# Altium PCB PCB FINAL V1.PcbDoc
Units mm, origin at the board's own origin, x right, y up, seen from the top; angles counter-clockwise.
Board outline 100 x 100 mm, 2 copper layers (Top Layer, Bottom Layer); 34 components, 34 nets, 134 pads, 53 vias.
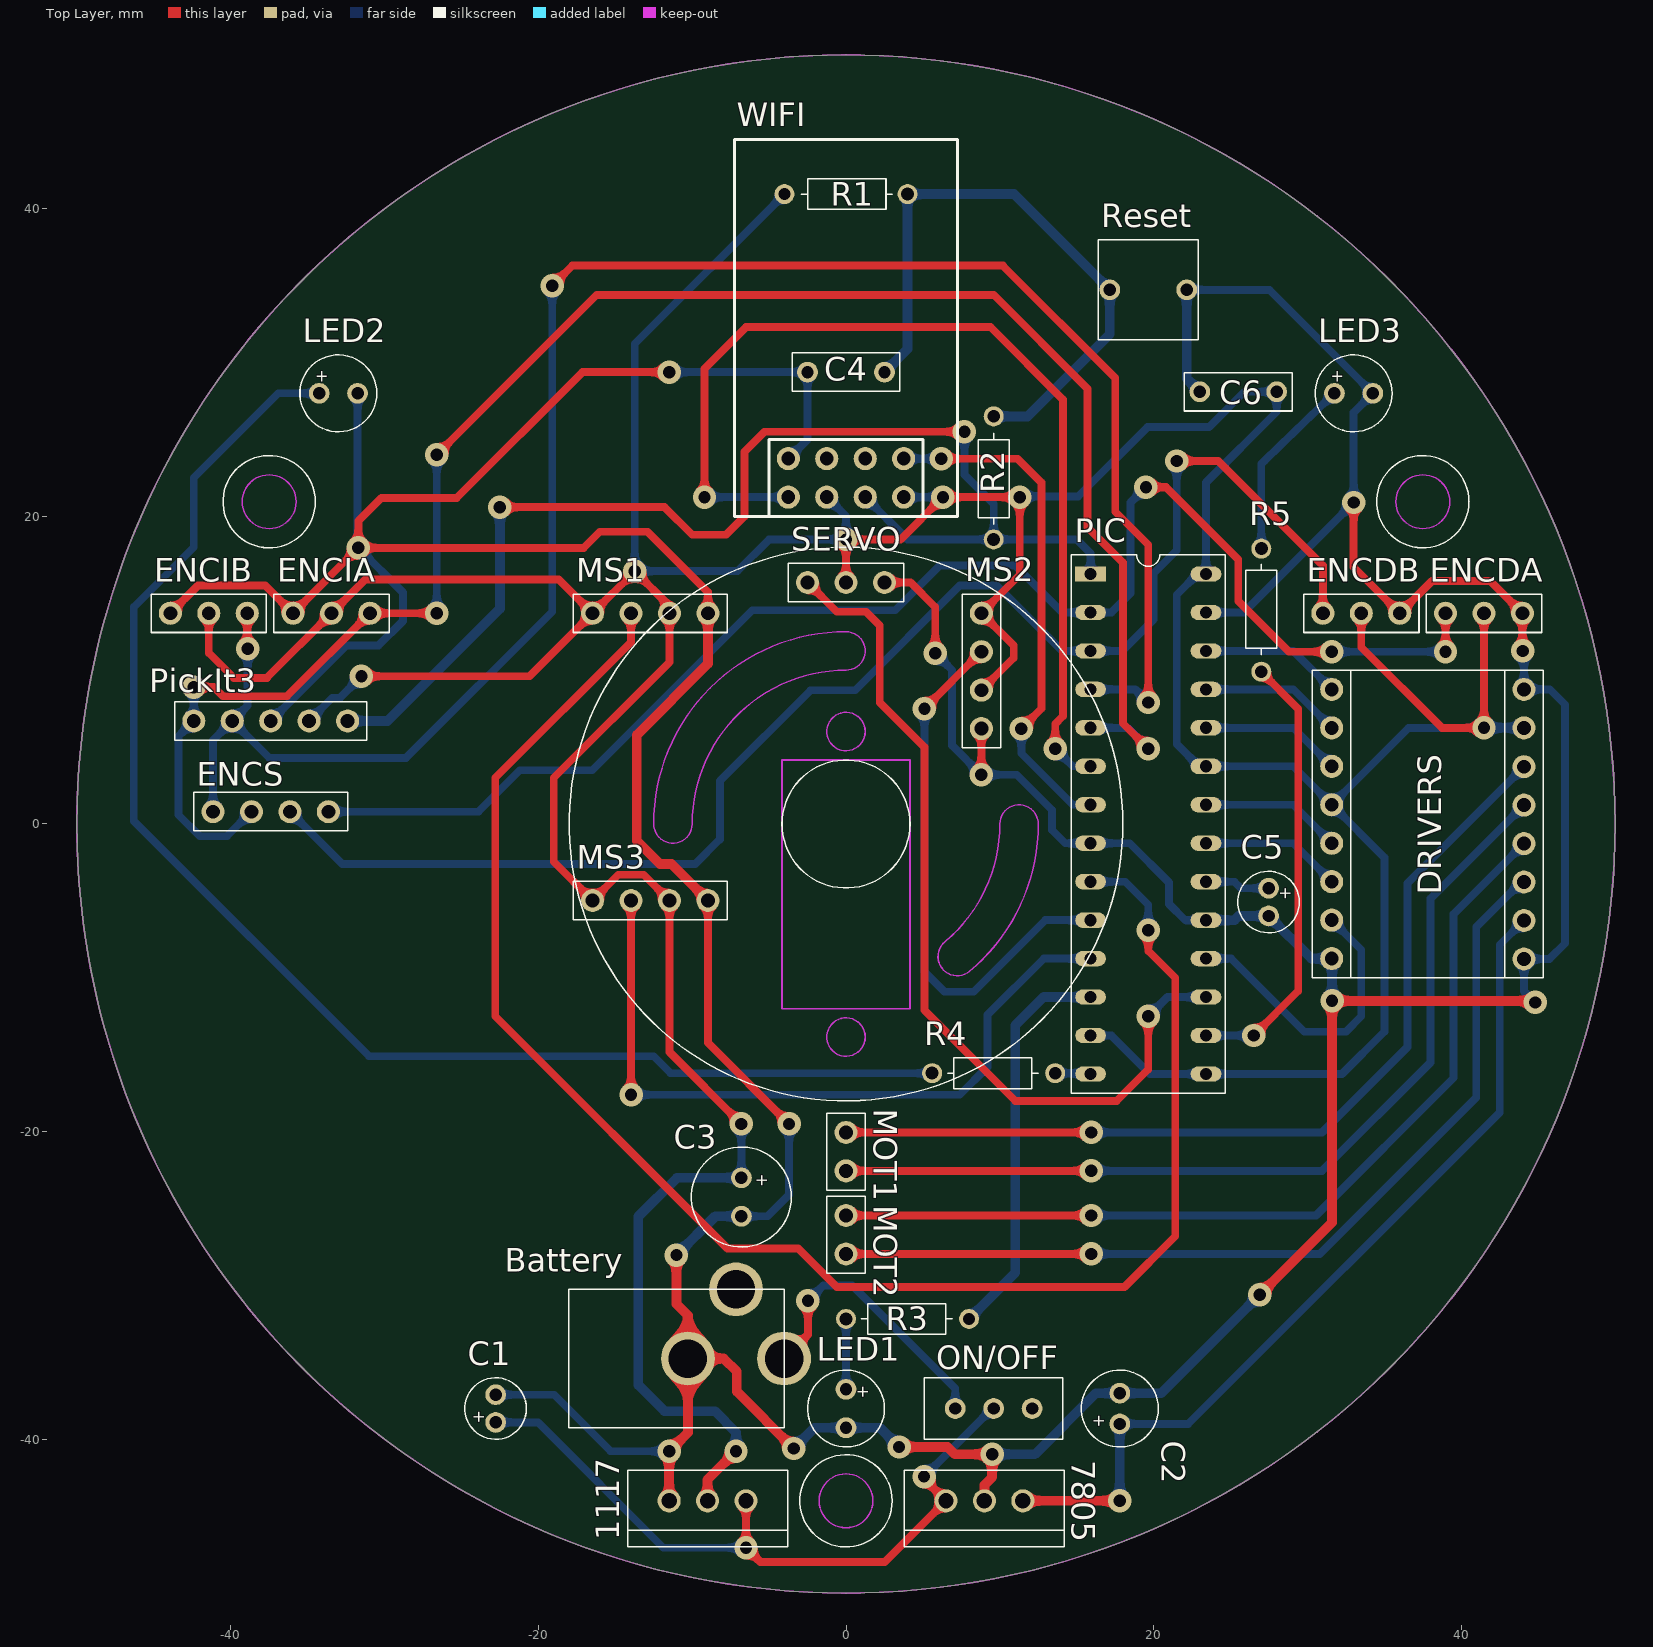
[diagram p0: Top Layer view]
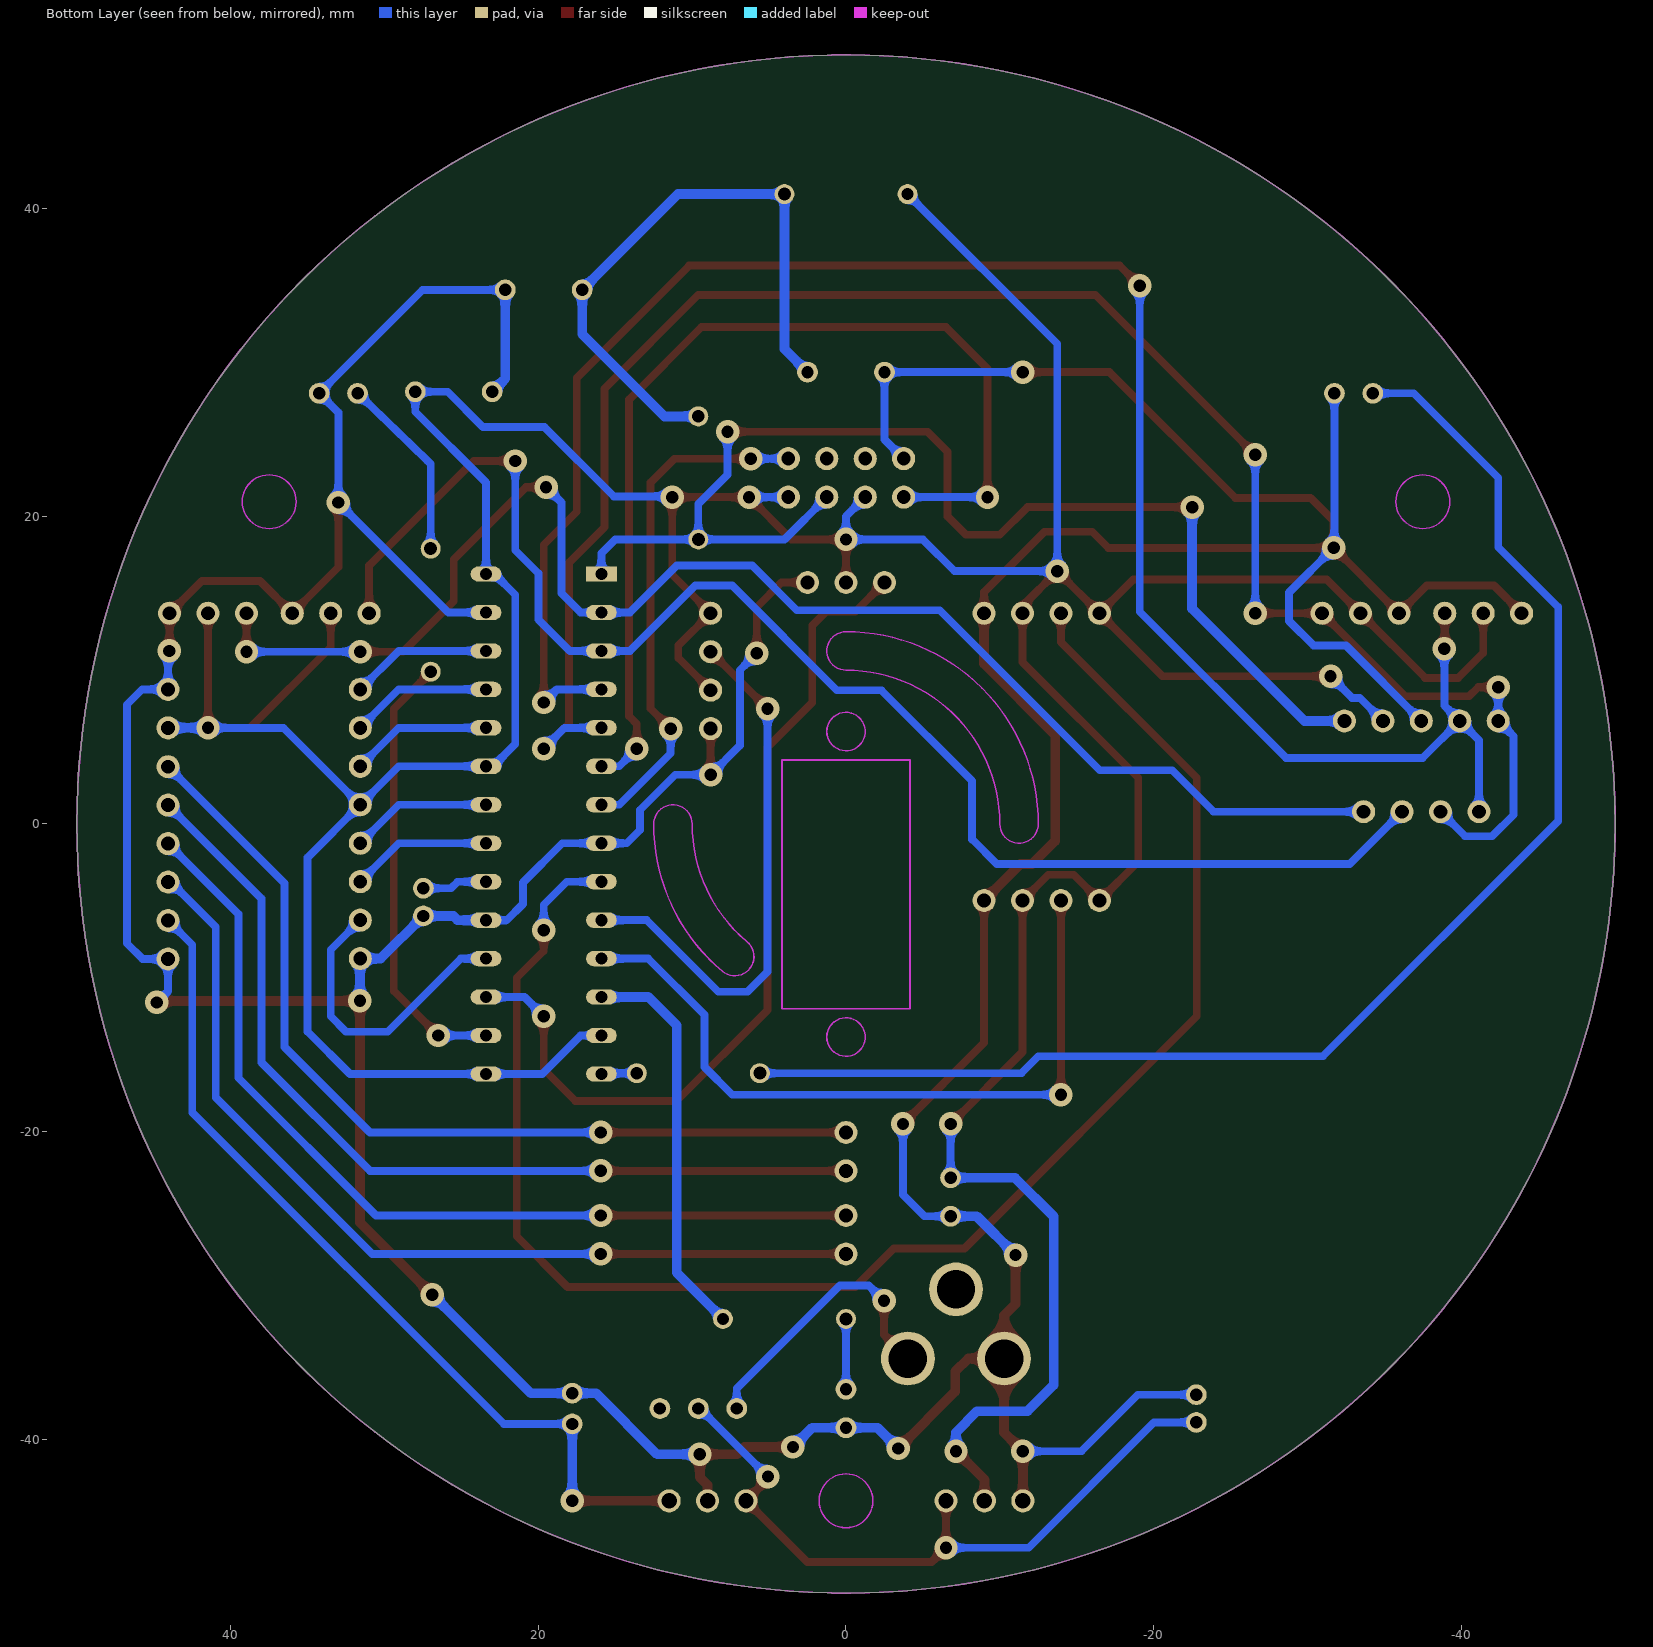
[diagram p1: Bottom Layer view, seen from below]

## Layer stack, top to bottom
Top Solder: solder mask 0.0102, Solder Resist, Dk 3.5
Top Layer: signal copper 0.0356
Dielectric 1: dielectric 0.32, FR-4, Dk 4.8
Bottom Layer: signal copper 0.0356
Bottom Solder: solder mask 0.0102, Solder Resist, Dk 3.5

## Board outline
-50,0 ccw(c0,0) 0,-50 ccw(c0,0) 50,0 ccw(c0,0) 0,50 ccw(c0,0)

## Design rules (kind name [scope] priority, off if disabled: settings)
Clearance [All] p1: gap=0.254
MinimumSolderMaskSliver [All] p1: minsoldermaskwidth=0.203
PolygonConnect [All] p1: connectstyle=Relief reliefconductorwidth=0.254 reliefentries=4 polygonreliefangle="90 Angle" airgapwidth=0.254
RoutingVias [All] p1: holewidth=0.711 width=1.27 viastyle="Through Hole" minholewidth=0.711 minwidth=1.27 maxholewidth=0.711 maxwidth=1.27
SilkToSilkClearance [All] p1: silktosilkclearance=0
SilkToSolderMaskClearance [IsPad] p1: minsilkscreentomaskgap=0 clearancetoexposedcopper=TRUE
SolderMaskExpansion [All] p1: expansion=0.102
Width [All] p1: maxlimit=0.635 minlimit=0.508 preferedwidth=0.508
27 further rules are at their usual default settings.

## Components (designator, comment, footprint, x,y, rotation, side; value= is the part's Value field where it differs from the comment)
1117 "LD1117L" "REG LD1117" -9,-44 r180 top
7805 "L7805CV" "REG 7805" 9,-44 r180 top
Battery "Battery" BATERIA -10.275,-34.75 r180 top
C1 "VIN" "Cap 10uF" -22.775,-38 r90 top
C2 "5.5V" "Cap 4.7uF" 17.8,-38 r90 top
C3 "3.3V" "Cap 100uF" -6.8,-24.25 r270 top
C4 "Reset" "Cap 100nF" 0,29.375 r180 top
C5 "Cap Pol1" "Cap 10uF" 27.475,-5.075 r270 top
C6 "Filtro" "Cap 100nF" 25.5,28.1 r180 top
DRIVERS "DRIVERS" Drivers 37.825,0 r270 top
ENCDA "ENCODER DERECHA A" ENCODER 41.475,13.7 r0 top
ENCDB "ENCODER DERECHA B" ENCODER 33.5,13.7 r0 top
ENCIA "ENCODER IZQUIERDA A" ENCODER -33.45,13.7 r180 top
ENCIB "ENCODER IZQUIERDA B" ENCODER -41.425,13.7 r180 top
ENCS "ENCODERS" "PINES - 4" -37.4,0.8 r180 top
LED1 "LED1" LED 0,-38 r270 top
LED2 "LED2" LED -33,28 r0 top
LED3 "LED3" LED 33,28 r0 top
MOT1 "MOTOR 1" MOTOR 0,-21.3 r270 top
MOT2 "MOTOR 2" MOTOR 0,-26.7 r90 top
MS1 "MaxSonar 1" MaxSonar -12.725,13.7 r180 top
MS2 "MaxSonar 2" MaxSonar 8.8,9.95 r90 top
MS3 "MaxSonar 3" MaxSonar -12.725,-4.975 r180 top
ON/OFF "SWITCH ON/OFF" "Switch ON/OFF" 9.6,-38 r0 top
PIC "PIC32MX250F128B-I/SP" Camita-28 19.65,0 r270 top
PickIt3 "PickIt 3 Programer" "PINES - 5" -37.4,6.7 r180 top
R1 "Res1" Resistor 0,40.95 r180 top
R2 "Res1" Resistor 9.6,22.5 r90 top
R3 "Led 1" Resistor 4,-32.175 r0 top
R4 "Led 2" Resistor 9.6,-16.2 r0 top
R5 "Led 3" Resistor 27,13.9 r270 top
Reset "Push Button Reset" "Push Button" 19.65,34.725 r0 top
SERVO "SERVO" SERVO 0,15.7 r0 top
WIFI "WIFI" WIFI 0,20 r0 top

## Footprints (in the part's own frame and the unit in brackets; to place one, negate y for a bottom-side part, rotate by r counter-clockwise, add the part's x,y. Pads: shape width x height; smd on the part's side, far side on the other; paste and mask are expansions set on the pad)
BATERIA [mm]
  round 3.5 hole 2.5: 1(0,0) 2(-6.25,0) ""(-3.125,-4.5)
  silkscreen extent -6.25,-4.5 7.75,4.5, body extent -6.38,-4.63 7.88,4.63, height 11
Camita-28 [mm]
  rect 1x2 hole 0.8: 1(-16.25,-3.75)
  oval 1x2 hole 0.8: 2(-13.75,-3.75) 3(-11.25,-3.75) 4(-8.75,-3.75) 5(-6.25,-3.75) 6(-3.75,-3.75) 7(-1.25,-3.75) 8(1.25,-3.75) 9(3.75,-3.75) 10(6.25,-3.75) 11(8.75,-3.75) 12(11.25,-3.75) 13(13.75,-3.75) 14(16.25,-3.75) 15(16.25,3.75) 16(13.75,3.75) 17(11.25,3.75) 18(8.75,3.75) 19(6.25,3.75) 20(3.75,3.75) 21(1.25,3.75) 22(-1.25,3.75) 23(-3.75,3.75) 24(-6.25,3.75) 25(-8.75,3.75) 26(-11.25,3.75) 27(-13.75,3.75) 28(-16.25,3.75)
  silkscreen extent -17.5,-5 17.5,5, body extent -17.5,-5 17.5,5, height 5.5
"Cap 4.7uF" [mm] "Capacitor Electrolítico 4.7uF - 50v"
  round 1.35 hole 0.8: 1(-1,0) 2(1,0)
  silkscreen extent -2.5,-2.5 2.5,2.5, body extent -2.49,-2.5 2.5,2.5, height 12
"Cap 10uF" [mm] "Capacitor Electrolítico 10uF - 25v"
  round 1.35 hole 0.8: 1(-0.9,0) 2(0.9,0)
  silkscreen extent -2,-2 2,2, body extent -2,-2 2,2, height 8
"Cap 100nF" [mm] "Capacitor Cerámico 100nF"
  round 1.35 hole 0.8: 1(-2.5,0) 2(2.5,0)
  silkscreen extent -3.5,-1.25 3.5,1.25, body extent -2,-1.25 2,1.25, height 4.6
"Cap 100uF" [mm] "Capacitor Electrolítico 100uF - 25v"
  round 1.35 hole 0.8: 1(-1.25,0) 2(1.25,0)
  silkscreen extent -3.25,-3.25 3.25,3.25, body extent -3.25,-3.25 3.25,3.25, height 8
Drivers [mm]
  round 1.5 hole 0.9: 1(-8.75,-6.25) 2(-6.25,-6.25) 3(-3.75,-6.25) 4(-1.25,-6.25) 5(1.25,-6.25) 6(3.75,-6.25) 7(6.25,-6.25) 8(8.75,-6.25) 9(8.775,6.25) 10(6.275,6.25) 11(3.775,6.25) 12(1.275,6.25) 13(-1.225,6.25) 14(-3.725,6.25) 15(-6.25,6.25) 16(-8.75,6.25)
  silkscreen extent -10,-7.5 10,7.5, body extent -10.1,-7.6 10.1,7.6, height 14
ENCODER [mm]
  round 1.5 hole 0.9: 1(-2.5,0) 2(0,0) 3(2.5,0)
  silkscreen extent -3.75,-1.25 3.75,1.25, body extent -3.75,-1.25 3.75,1.25, height 16.4
LED [mm] "Standar Led"
  round 1.35 hole 0.8: 1(-1.25,0) 2(1.25,0)
  silkscreen extent -2.5,-2.5 2.5,2.5, body extent -2.5,-2.5 2.5,2.5, height 9
MaxSonar [mm] "Ultrasónico MaxSonar"
  round 1.5 hole 0.9: 1(-3.75,0) 2(-1.25,0) 3(1.25,0) 4(3.75,0)
  silkscreen extent -5,-1.25 5,1.25, body extent -5,-1.25 5,1.25, height 11
MOTOR [mm]
  round 1.5 hole 0.9: 1(-1.25,0) 2(1.25,0)
  silkscreen extent -2.5,-1.25 2.5,1.25, body extent -2.5,-1.25 2.5,1.25, height 11
"PINES - 4" [mm]
  round 1.5 hole 0.9: 1(-3.75,0) 2(-1.25,0) 3(1.25,0) 4(3.75,0)
  silkscreen extent -5,-1.25 5,1.25, body extent -5,-1.25 5,1.25, height 8
"PINES - 5" [mm]
  round 1.5 hole 0.9: 1(-5,0) 2(-2.5,0) 3(0,0) 4(2.5,0) 5(5,0)
  silkscreen extent -6.25,-1.25 6.25,1.25, body extent -6.25,-1.25 6.25,1.25, height 8
"Push Button" [mm]
  round 1.35 hole 0.8: 1(-2.5,0) 2(2.5,0)
  silkscreen extent -3.25,-3.25 3.25,3.25, body extent -3.25,-3.25 3.25,3.25, height 4.5
"REG 7805" [mm] "REGULADOR +5V"
  round 1.5 hole 1: 1(2.5,0) 2(0,0) 3(-2.5,0)
  silkscreen extent -5.2,-2 5.2,3, body extent -5.2,-2 5.2,3, height 18.48
"REG LD1117" [mm] "REGULADOR +3.3V"
  round 1.5 hole 1: 1(2.5,0) 2(0,0) 3(-2.5,0)
  silkscreen extent -5.2,-2 5.2,3, body extent -5.2,-2 5.2,3, height 18.48
Resistor [mm]
  round 1.3 hole 0.85: 1(-4,0)
  round 1.3 hole 0.8: 2(4,0)
  silkscreen extent -3,-1 2.9,1, body extent -2.6,-1 2.48,1, height 2.3
SERVO [mm]
  round 1.5 hole 0.9: 1(-2.5,0) 2(0,0) 3(2.5,0)
  silkscreen extent -3.75,-1.25 3.75,1.25, body extent -3.75,-1.25 3.75,1.25, height 16.4
"Switch ON/OFF" [mm] "Switch ON/OFF"
  round 1.35 hole 0.8: 1(-2.5,0) 2(0,0) 3(2.5,0)
  silkscreen extent -4.5,-2 4.5,2, body extent -4.5,-2 4.5,2, height 6.5
WIFI [mm]
  round 1.5 hole 0.9: 1(-3.75,1.25) 2(-1.25,1.25) 3(1.25,1.25) 4(3.75,1.25) 5(3.75,3.75) 6(1.25,3.75) 7(-1.25,3.75) 8(-3.75,3.75)
  silkscreen extent -7.25,0 7.25,24.5, body extent -7.35,-0.1 7.35,24.6, height 14

## Part data
1117 7805: library part L7812ABV, "Precision 1A Regulator"
Battery MOT1 MOT2 Reset: library part "Header 2", "Header, 2-Pin"
C1 C2: library part Cap2, "Capacitor"
C3: library part "Cap Pol1", "Polarized Capacitor (Radial)"
C4 C6: library part Cap, "Capacitor"
C5: "Polarized Capacitor (Radial)"
DRIVERS: library part "Header 16", "Header, 16-Pin"
ENCDA ENCDB ENCIA ENCIB ON/OFF SERVO: library part "Header 3", "Header, 3-Pin"
ENCS MS1 MS2 MS3: library part "Header 4", "Header, 4-Pin"
LED1 LED2 LED3: library part LED0, "Typical INFRARED GaAs LED"
PIC: "32-bit Microcontroller with Audio and Graphics Interface, USB and Advanced Analog, 50 MHz, 19 I/O, PMP, -40 to 85 degC, 28-pin SPDIP (SP28), Tube"
PickIt3: library part "Header 5", "Header, 5-Pin"
R1 R2: "Resistor"
R3 R4 R5: library part Res1, "Resistor"
WIFI: library part "Header 8", "Header, 8-Pin"

## Via types
v1: diameter 1.524, hole 0.8, Top Layer to Bottom Layer, 53 vias

## Nets (pads, with @x,y where several pads share a name; then routed paths per layer and width w, separated by ;. In a path a pad name is that pad's centre, name@x,y a point inside that pad or via, vN(x,y) a via of type N, cw(c..) or ccw(c..) an arc to the next point about the centre after c; other vN are vias at no path point)
3.3V: 1117.2 C3.1 C6.1 DRIVERS.4 DRIVERS.15 ENCDA.2 ENCDB.2 ENCIA.2 ENCIB.2 MS1.2 MS1.4 MS2.2 MS2.4 MS3.2 MS3.4 PIC.13 PIC.15 PIC.23 PIC.28 PickIt3.2 R1.2 SERVO.2 WIFI.2 WIFI.4 | length 349.9
  Top Layer w0.508: ENCIB.2 -41.425,11.125 -39.8,9.5 -37.65,9.5 ENCIA.2 -31.25,15.9 -18.675,15.9 MS1.4 ; v1(-31.5,9.6) -20.575,9.6 MS1.4 ; v1(-6.8,-19.5) -11.475,-14.825 MS3.2 -13.15,-3.3 -14.8,-3.3 MS3.4 -19,-2.45 -19,3 -11.475,10.525 MS1.2 -11.475,14.175 v1(-13.738,16.438) MS1.4 ; SERVO.2 v1(0,18.5) 3.55,18.5 v1(6.3,21.25) v1(11.3,21.25) ; MS2.2 10.9,10.8 10.9,11.6 MS2.4 11.3,16.2 11.3,20.9 v1@11.5,21.1 ; ENCDB.2 33.5,11.5 38.75,6.25 v1(41.475,6.25) ENCDA.2
  Top Layer w0.635: 1117.2 -9,-42.625 v1(-7.15,-40.775)
  Bottom Layer w0.508: PickIt3.2 -33.4,8.2 -32.9,8.2 v1(-31.5,9.6) ; C3.1 v1(-6.8,-19.5) ; R1.2 -13.738,31.213 v1(-13.738,16.438) -7.063,16.438 -5,18.5 v1(0,18.5) 0,20 WIFI.2 ; WIFI.4 v1(6.3,21.25) ; v1@11.3,21.1 11.5,21.3 15.1,21.3 19.6,25.8 23.6,25.8 25.9,28.1 C6.1 28,26.8 23.4,22.2 PIC.28 22.85,16.25 21.5,14.9 21.5,5.2 22.95,3.75 PIC.23 29.075,3.75 DRIVERS.4 ; PIC.13 17.25,-13.75 19.75,-16.25 PIC.15 32.25,-16.25 35,-13.5 35,-2.175 DRIVERS.4 ; v1(41.475,6.25) 36.575,6.25 DRIVERS.4
  Bottom Layer w0.635: v1(-7.15,-40.775) -7.15,-39.55 -8.525,-38.175 -11.8,-38.175 -13.5,-36.475 -13.5,-25.5 -11,-23 C3.1 ; v1(41.475,6.25) DRIVERS.15
5V: 7805.3 C2.1 DRIVERS.10 | length 57.5
  Top Layer w0.635: 7805.3 v1(17.8,-44)
  Bottom Layer w0.508: C2.1 22.25,-39 42.5,-18.75 42.5,-7.85 DRIVERS.10
  Bottom Layer w0.635: v1(17.8,-44) C2.1
+9V: 1117.3 7805.1 C1.1 ON/OFF.2 | length 46.2
  Top Layer w0.508: 1117.3 v1(-6.5,-47.05) -5.575,-47.975 2.525,-47.975 7805.1 5.075,-42.575 v1(5.075,-42.425)
  Bottom Layer w0.508: C1.1 -20.025,-38.9 -11.875,-47.05 v1(-6.5,-47.05) ; v1(5.075,-42.425) ON/OFF.2@9.5,-38
+9VIN: Battery.2 ON/OFF.1 | length 18.5
  Top Layer w0.508: Battery.2 -2.475,-33.2 v1(-2.475,-31)
  Bottom Layer w0.508: v1(-2.475,-31) -1.475,-30 0.4,-30 7.1,-36.7 ON/OFF.1
AIN1: DRIVERS.3 PIC.24 | length 9.2
  Bottom Layer w0.508: PIC.24 29.075,6.25 DRIVERS.3
AIN2: DRIVERS.2 PIC.25 | length 9.2
  Bottom Layer w0.508: PIC.25 26.512,8.75 26.52,8.742 27.48,8.742 27.488,8.75 29.075,8.75 DRIVERS.2
AO1: DRIVERS.14 MOT1.1 | length 60.2
  Top Layer w0.508: MOT1.1 v1(15.95,-20.05)
  Bottom Layer w0.508: v1(15.95,-20.05) 30.95,-20.05 36.5,-14.5 36.5,-3.85 DRIVERS.14
AO2: DRIVERS.13 MOT1.2 | length 60.2
  Top Layer w0.508: MOT1.2 v1(15.95,-22.55)
  Bottom Layer w0.508: v1(15.95,-22.55) 30.95,-22.55 38,-15.5 38,-4.85 DRIVERS.13
BIN1: DRIVERS.5 PIC.22 | length 9.2
  Bottom Layer w0.508: PIC.22 29.075,1.25 DRIVERS.5
BIN2: DRIVERS.6 PIC.21 | length 9.2
  Bottom Layer w0.508: PIC.21 29.075,-1.25 DRIVERS.6
BO1: DRIVERS.11 MOT2.1 | length 60.4
  Top Layer w0.508: MOT2.1 v1(15.95,-27.95)
  Bottom Layer w0.508: v1(15.95,-27.95) 30.8,-27.95 40.975,-17.775 40.975,-6.693 DRIVERS.11@43.893,-3.775
BO2: DRIVERS.12 MOT2.2 | length 60.3
  Top Layer w0.508: MOT2.2 v1(15.95,-25.45)
  Bottom Layer w0.508: v1(15.95,-25.45) 30.55,-25.45 39.5,-16.5 39.5,-5.85 DRIVERS.12
ENCDA: ENCDA.1 ENCS.1 PIC.2 | length 95.9
  Top Layer w0.508: v1(19.5,21.9) 20.8,21.9 25.5,17.2 25.5,14.5 28.8,11.2 v1(31.575,11.2) ; v1(38.975,11.2) ENCDA.1
  Bottom Layer w0.508: ENCS.1 -23.9,0.8 -21.2,3.5 -16.5,3.5 -6.1,13.9 3.2,13.9 6.1,16.8 11,16.8 14.05,13.75 PIC.2 17.25,13.75 18.5,15 18.5,20.9 v1(19.5,21.9) ; v1(31.575,11.2) v1(38.975,11.2)
ENCDB: ENCDB.1 ENCS.2 PIC.3 | length 96.2
  Top Layer w0.508: v1(21.5,23.6) 24.2,23.6 31,16.8 ENCDB.1
  Bottom Layer w0.508: ENCS.2 -32.75,-2.6 -9.8,-2.6 -8.2,-1 -8.2,2.8 -2.3,8.7 0.6,8.7 7.4,15.5 9.8,15.5 14.05,11.25 PIC.3 17.95,11.25 20,13.3 20,16.3 21.5,17.8 v1(21.5,23.6)
ENCIA: ENCIA.1 ENCS.3 PIC.5 PickIt3.5 | length 121.8
  Top Layer w0.508: v1(-42.4,8.9) -41.1,8.9 -40.5,8.3 -36.35,8.3 ENCIA.1 v1(-26.6,13.7) ; v1(-26.6,24) -16.2,34.4 9.6,34.4 15.7,28.3 15.7,19.3 18,17 18,6.55 v1(19.65,4.9)
  Bottom Layer w0.508: v1(-42.4,8.9) PickIt3.5 -43.4,5.7 -43.4,0.6 -42,-0.8 -40.25,-0.8 ENCS.3 ; v1(-26.6,13.7) v1(-26.6,24) ; PIC.5 18.3,6.25 v1(19.65,4.9)
ENCIB: ENCIB.1 ENCS.4 PIC.4 PickIt3.4 | length 127
  Top Layer w0.508: v1@-38.925,11.425 ENCIB.1 ; v1(-19.1,35) -17.8,36.3 10.2,36.3 17.5,29 17.5,20.3 19.65,18.15 v1(19.65,7.9)
  Bottom Layer w0.508: ENCS.4 -41.15,5.45 PickIt3.4 ; v1(-38.9,11.4) -38.9,7.7 PickIt3.4 ; v1(-19.1,35) -19.1,13.8 -28.6,4.3 -37.5,4.3 PickIt3.4 ; PIC.4 18.8,8.75 v1(19.65,7.9)
GND: 1117.1 7805.2 Battery.1 C1.2 C2.2 C3.2 C4.2 C5.2 C6.2 DRIVERS.8 DRIVERS.9 DRIVERS.16 ENCDA.3 ENCDB.3 ENCIA.3 ENCIB.3 LED1.2 LED2.2 LED3.2 MS1.1 MS2.1 MS3.1 PIC.8 PIC.19 PIC.27 PickIt3.3 Reset.2 SERVO.3 WIFI.8 | length 417.4
  Top Layer w0.508: ENCIB.3 -42.125,15.5 -37.75,15.5 ENCIA.3 v1(-31.7,17.95) ; v1(-11.5,29.375) -17.125,29.375 -25.3,21.2 -30.2,21.2 -31.7,19.7 v1(-31.7,17.95) ; MS3.1 -8.975,-14.225 v1(-3.7,-19.5) ; MS1.1 -8.975,15.075 -12.9,19 -16,19 -17.05,17.95 v1(-31.7,17.95) ; SERVO.3 4.2,15.7 5.8,14.1 v1(5.8,11.1) ; v1(8.8,3.2) MS2.1 ; v1(33,20.9) 33,16.7 ENCDB.3 38.1,15.8 41.875,15.8 ENCDA.3 v1@43.975,11.275
  Top Layer w0.635: 1117.1 v1(-11.5,-40.775) -10.275,-39.55 Battery.1 ; v1(-11.025,-28.025) -11.025,-31.2 -10.275,-31.95 Battery.1 ; MS3.1 -11.35,-2.6 -12.1,-2.6 -13.6,-1.1 -13.6,5.8 -8.975,10.425 MS1.1 ; v1(-3.4,-40.6) -7.1,-36.9 -7.1,-35.6 -7.95,-34.75 Battery.1 ; v1(3.45,-40.5) 6.6,-40.5 7.075,-40.975 v1(9.5,-40.975) 9.5,-42.475 9,-42.975 7805.2 ; v1(26.9,-30.6) 31.6,-25.9 v1(31.6,-11.5) v1@44.7,-11.5
  Bottom Layer w0.508: PickIt3.3 -32.5,11.6 -30.4,11.6 -28.8,13.2 -28.8,15.05 v1(-31.7,17.95) ; v1@-31.75,18 LED2.2 ; C1.2 -18.975,-37.1 -15.3,-40.775 v1(-11.5,-40.775) ; v1(-11.5,29.375) C4.2 -2.5,25 WIFI.8 ; C3.2 -5.1,-25.5 -3.7,-24.1 v1(-3.7,-19.5) ; v1(5.8,11.1) 6.9,10 6.9,5.1 v1(8.8,3.2) 11.1,3.2 13.4,0.9 13.4,-0.4 14.25,-1.25 PIC.8 18.45,-1.25 21,-3.8 21,-5.2 22.05,-6.25 PIC.19 ; Reset.2 27.525,34.725 LED3.2 33,26.75 v1(33,20.9) 25.85,13.75 PIC.27 ; v1(44,11.25) 44.075,11.175 DRIVERS.16 45.75,8.75 46.75,7.75 46.75,-7.75 45.725,-8.775 DRIVERS.9 44.075,-10.875 v1(44.8,-11.6)
  Bottom Layer w0.635: v1(-11.025,-28.025) -8.5,-25.5 C3.2 ; v1(-3.4,-40.6) -2.05,-39.25 LED1.2 2.2,-39.25 v1(3.45,-40.5) ; v1(9.5,-40.975) 12.275,-40.975 16.25,-37 C2.2 20.5,-37 v1(26.9,-30.6) ; Reset.2 22.15,28.95 C6.2 ; PIC.19 25.25,-6.25 25.525,-5.975 C5.2 30.25,-8.75 DRIVERS.8 ; v1(31.6,-11.5) DRIVERS.8@31.6,-8.775
LED1: PIC.12 R3.2 | length 26
  Bottom Layer w0.635: R3.2 11,-29.175 11,-13.1 12.85,-11.25 PIC.12
LED2: PIC.14 R4.2 | length 2.2
  Bottom Layer w0.508: R4.2 PIC.14@15.85,-16.2
LED3: PIC.16 R5.2 | length 28.9
  Top Layer w0.508: v1(26.5,-13.75) 29.4,-10.85 29.4,7.475 R5.2@26.987,9.888
  Bottom Layer w0.508: PIC.16 v1(26.5,-13.75)
MS1: MS1.3 PIC.9 | length 109.4
  Top Layer w0.508: MS1.3 -13.975,11.825 -22.8,3 -22.8,-12.5 -7.7,-27.6 -3.1,-27.6 -0.6,-30.1 18.1,-30.1 21.4,-26.8 21.4,-10 19.65,-8.25 v1(19.65,-6.9)
  Bottom Layer w0.508: PIC.9 18.15,-3.75 19.65,-5.25 v1(19.65,-6.9)
MS2: MS2.3 PIC.10 | length 35.6
  Top Layer w0.508: v1(5.1,7.5) MS2.3
  Bottom Layer w0.508: v1(5.1,7.5) 5.1,-9.6 6.4,-10.9 8.3,-10.9 12.95,-6.25 PIC.10
MS3: MS3.3 PIC.11 | length 48.2
  Top Layer w0.508: v1(-13.975,-17.6) MS3.3
  Bottom Layer w0.508: v1(-13.975,-17.6) 7.4,-17.6 9.2,-15.8 9.2,-12.4 12.85,-8.75 PIC.11
NetC4_1: C4.1 R1.1 R2.2 Reset.1 | length 40.6
  Bottom Layer w0.635: C4.1 4,30.875 R1.1 10.925,40.95 Reset.1 17.15,31.85 11.8,26.5 R2.2
NetC5_1: C5.1 PIC.20 | length 4.3
  Bottom Layer w0.508: PIC.20 25.25,-3.75 25.675,-4.175 C5.1
NetLED1_1: LED1.1 R3.1 | length 4.6
  Bottom Layer w0.508: LED1.1 R3.1
NetLED2_1: LED2.1 R4.1 | length 93
  Bottom Layer w0.508: LED2.1 -36.9,28 -42.4,22.5 -42.4,18 -46.3,14.1 -46.3,0.2 -31,-15.1 -12.5,-15.1 -11.4,-16.2 R4.1
NetLED3_1: LED3.1 R5.1 | length 12.4
  Bottom Layer w0.508: R5.1@26.9,17.975 R5.1@27.075,17.8 ; R5.1 27,23.4 27.2,23.6 LED3.1
PWMA: DRIVERS.1 PIC.26 | length 9.2
  Bottom Layer w0.508: PIC.26 29.075,11.25 DRIVERS.1
PWMB: DRIVERS.7 PIC.18 | length 19.5
  Bottom Layer w0.508: PIC.18 25.05,-8.75 29.8,-13.5 32.5,-13.5 33.5,-12.5 33.5,-8.175 DRIVERS.7
PWMS: PIC.17 SERVO.1 | length 57.6
  Top Layer w0.508: SERVO.1 -0.6,13.8 1.3,13.8 2.2,12.9 2.2,7.9 5.1,5 5.1,-12.1 11,-18 17.6,-18 19.65,-15.95 v1(19.65,-12.5)
  Bottom Layer w0.508: v1(19.65,-12.5) 20.9,-11.25 PIC.17
RESET: PIC.1 PickIt3.1 R2.1 WIFI.3 | length 81
  Top Layer w0.508: v1(-22.5,20.6) -11.8,20.6 -10,18.8 -7.8,18.8 -6.6,20 -6.6,24.2 -5.3,25.5 v1(7.7,25.5)
  Bottom Layer w0.508: WIFI.3 4,18.5 R2.1 ; v1(7.7,25.5) 7.7,22.7 9.6,20.8 R2.1 ; PIC.1 15.9,17.6 15,18.5 R2.1
  Bottom Layer w0.635: PickIt3.1 -29.8,6.7 -22.5,14 v1(-22.5,20.6)
RX: PIC.7 WIFI.5 | length 33.6
  Top Layer w0.508: v1(6.2,23.75) 11.15,23.75 12.7,22.2 12.7,7.5 v1(11.4,6.2)
  Bottom Layer w0.508: WIFI.5 v1(6.2,23.75) ; v1(11.4,6.2) 11.4,4.6 14.75,1.25 PIC.7
TX: PIC.6 WIFI.1 | length 65.8
  Top Layer w0.508: v1(-9.2,21.25) -9.2,29.6 -6.5,32.3 9.4,32.3 14.1,27.6 14.1,7 13.6,6.5 v1(13.6,4.9)
  Bottom Layer w0.508: v1(-9.2,21.25) WIFI.1 ; v1(13.6,4.9) 14.75,3.75 PIC.6
pads on no net: Battery. ON/OFF.3 WIFI.6 WIFI.7

## Keep-outs
Keep-Out Layer:
  circle w0.1: c-37.5,20.952 r1.75
  circle w0.1: c37.5,20.952 r1.75
  circle w0.1: c0,-44 r1.75
  circle w0.1: c0,6.01 r1.25
  circle w0.1: c0,-13.85 r1.25
  circle w0.1: c0,0 r50
  lines w0.1: 8.034,-9.576 cw(c7.231,-8.618) 6.428,-7.66 ccw(c0,0) 10,0 cw(c11.25,0) 12.5,0 cw(c0,0) 8.035,-9.576 ; -12.5,0 ccw(c-11.25,0) -10,0 cw(c0,0) 0,10 ccw(c0,11.25) 0,12.5 ccw(c0,0) -12.5,0 ; -4.16,-12 -4.16,4.16 4.16,4.16 4.16,-12 -4.16,-12

## Silkscreen, mask and mechanical layers (free items; w line width, h text height)
Top Overlay:
  circle w0.1: c-37.5,20.952 r3
  circle w0.1: c37.5,20.952 r3
  circle w0.1: c0,-44 r3
  circle w0.1: c0,0 r18
  circle w0.1: c0,0 r4.16

## Text inside footprints (layer, text, board x,y; h text height)
C1: Top Overlay "+" at -23.525,-39 h0.75 r90
C2: Top Overlay "+" at 16.8,-39.25 h0.75 r90
C3: Top Overlay "+" at -5.8,-22.75 h0.75 r270
C5: Top Overlay "+" at 28.225,-4.075 h0.75 r270
LED1: Top Overlay "+" at 0.75,-36.5 h0.75 r270
LED2: Top Overlay "+" at -34.5,28.75 h0.75
LED3: Top Overlay "+" at 31.5,28.75 h0.75